# EAGLE board UOF_proto_2V4 (EAGLE 9.5.2)
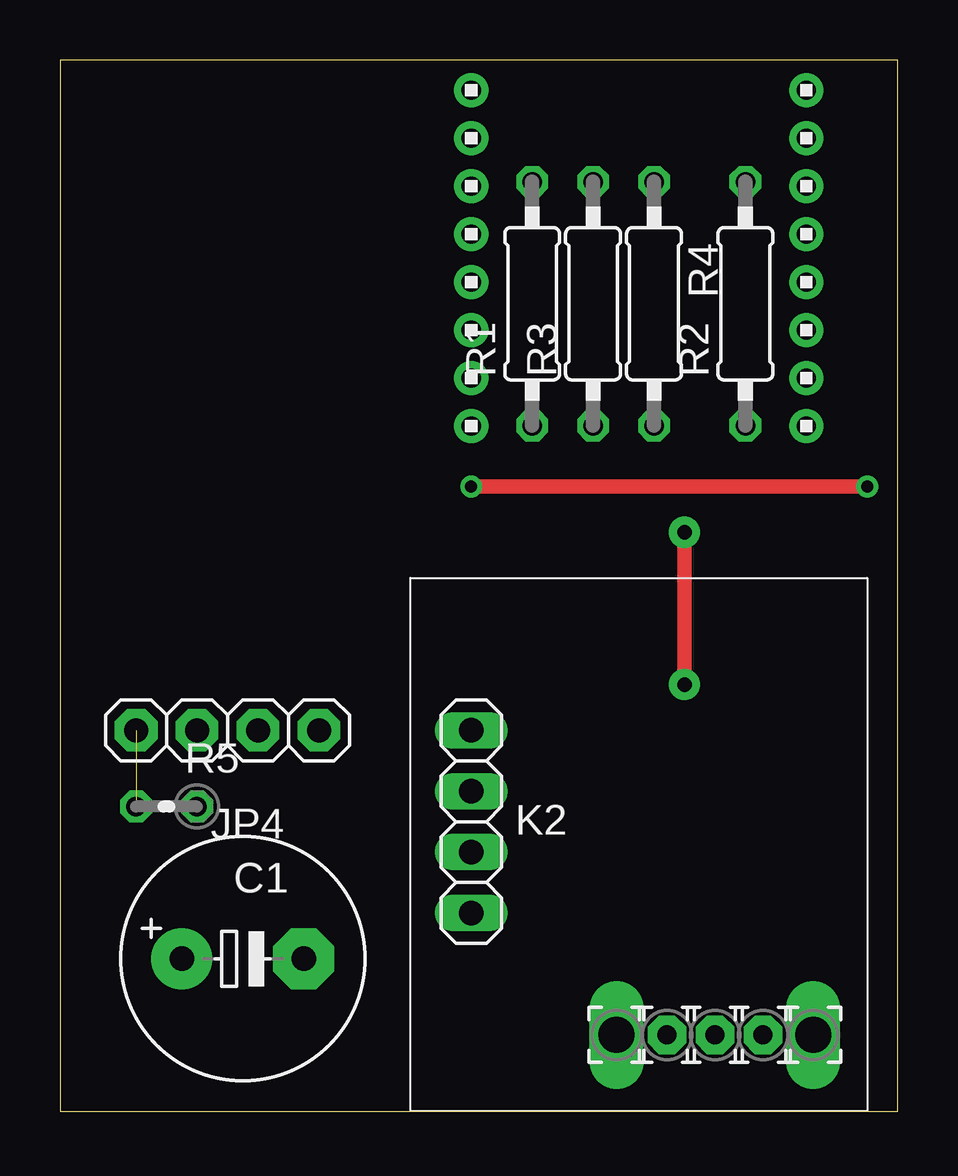
[diagram p0: board, top side]
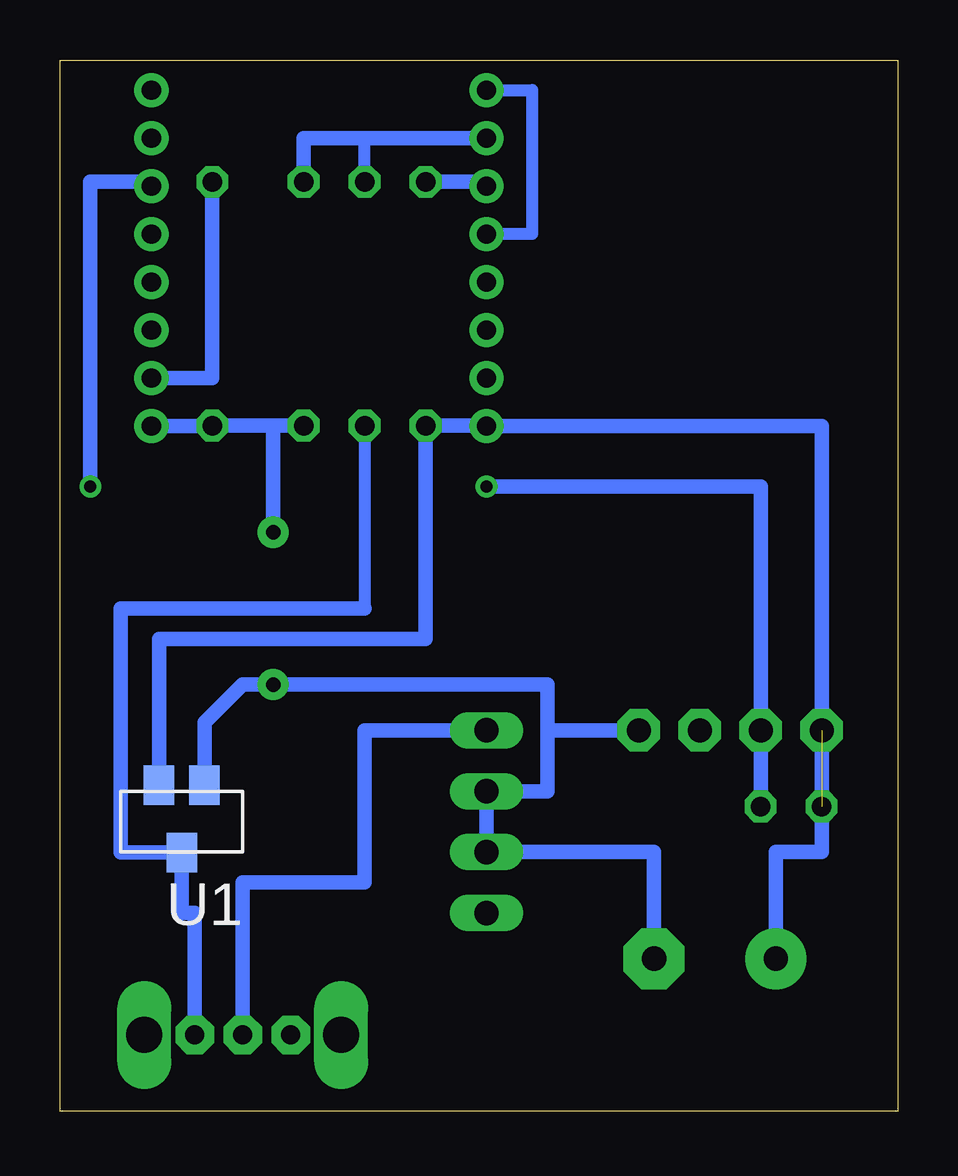
[diagram p1: board, bottom side, seen from below]

Size 34.92 x 43.81 mm. Coordinates in mm from the lower left corner, seen from the top.
Outline: 0,0 34.92,0 34.92,43.81 0,43.81 0,0
Copper layers (1*16): Top 0.035mm / dielectric 1.5mm / Bottom 0.035mm
Design rules "default": minimum track width 20mil, minimum drill 0.5mm, track to track 20mil, track to pad 20mil, pad to pad 20mil, via to via 20mil, smd to smd 20mil, copper to edge 30mil, drill to drill 20mil, minimum pad ring 10mil, minimum via ring 8mil, stop-mask expansion 4mil, vias tented up to drill 0mil, thermal gap 10mil
Net classes: 0 default: width 0.508 mm, clearance 0.508 mm

## Footprints (pad centres in the part's own frame; a part is rotated, then mirrored left to right if it is on the bottom)
E5-10,5 = drill 1.016 pad 2.54: + -2.54,0 | drill 1.016 pad 2.54 octagon: - 2.54,0
1X04 = drill 1 pad 1.778 octagon: 1 -3.81,0; 2 -1.27,0; 3 1.27,0; 4 3.81,0
1X04' = drill 1.016 long: 1 -3.81,0; 2 -1.27,0; 3 1.27,0; 4 3.81,0
1,6/0,8 = drill 0.8 pad 1.6 octagon: 1 0,0
2,0/1,5 = drill 1.5 pad 2 long: 1 0,0
0207/10 = drill 0.813 octagon: 1 -5.08,0; 2 5.08,0
0204V = drill 0.813 octagon: 1 -1.27,0; 2 1.27,0
SOT-23 = smd 1.27 x 1.651: P$1 -0.95,-0.254; P$2 0.95,-0.254; P$3 0,2.554
1X8 = drill 0.8 pad 1.422: 1 -7,0; 2 -5,0; 3 -3,0; 4 -1,0; 5 1,0; 6 3,0; 7 5,0; 8 7,0

## Placement (x,y rotation side)
C1  220µF  [E5-10,5]  7.62,6.35 0 top
JP4  [1X04]  6.99,15.88 0 top
K2  Adafruit micro chargeur  [1X04']  17.14,12.06 270 top
PAD1  1,6/0,8  [1,6/0,8]  27.3,3.17 0 top
PAD2  1,6/0,8  [1,6/0,8]  29.3,3.17 0 top
PAD3  1,6/0,8  [1,6/0,8]  25.3,3.17 0 top
PAD4  N_2,0/1,5  [2,0/1,5]  23.2,3.17 90 top
PAD5  N_2,0/1,5  [2,0/1,5]  31.41,3.17 90 top
R1  12k  [0207/10]  19.68,33.66 90 top
R2  12k  [0207/10]  28.57,33.66 90 top
R3  330k  [0207/10]  22.23,33.66 90 top
R4  100k  [0207/10]  24.77,33.66 270 top
R5  4,7k  [0204V]  4.45,12.7 180 top
U1  MCP1700T-33  [SOT-23]  29.84,13.34 180 bottom
U$1  1X8  [1X8]  17.14,35.56 270 top
U$2  1X8  [1X8]  31.11,35.56 270 top

## Library data of the parts
C1 = rcl; SPICEPREFIX: C
JP4 = _MCL_pinhead
K2 = pinhead
PAD1-PAD5 = _MCL_PADS
R1-R5 = rcl; SPICEPREFIX: R
U1 = MCP1700T-3302E
U$1 U$2 = headers(2mm)

## Nets
GND: C1.- JP4.4 K2.2 K2.3 R2.1 R4.2 U1.P$1 U$2.8
N$2: R3.2 R4.1 U$1.2
N$3: K2.1 PAD1.1
N$4: R2.2 U$2.7
N$5: C1.+ JP4.1 R1.1 R5.2 U1.P$2 U$1.8
N$7: U$1.1 U$1.4
N$8: PAD2.1 R3.1 U1.P$3
N$9: R1.2 U$1.3
N$14: JP4.2 R5.1 U$2.3

## Tracks (layer width: path | path; a pad name or v marks a point on that pad's centre or on a via)
GND  (via drill 0.6 pad 1.3)
  Top 0.61: v26.04,24.13 v26.04,17.78
  Bottom 0.61: v26.04,17.78 14.61,17.78 14.61,15.88 | v26.04,17.78 24.45,17.78 | 26.04,28.57 R2.1 28.57,28.56 U$2.8 28.56,28.56 | 26.04,28.57 R4.2 | U1.P$1 28.89,16.19 27.3,17.78 v26.04,17.78 | 14.61,15.88 14.61,13.34 K2.2 K2.3 10.16,10.79 C1.- | v26.04,24.13 26.04,28.57 | JP4.4 14.61,15.88
N$2
  Bottom 0.508: R3.2 22.23,40.56
  Bottom 0.61: U$1.2 22.23,40.56 24.77,40.56 R4.1
N$3
  Bottom 0.61: PAD1.1 27.3,9.53 22.23,9.53 22.23,15.88 K2.1
N$4
  Bottom 0.61: U$2.7 28.57,30.56 R2.2
N$5  (1 unrouted)
  Bottom 0.61: U1.P$2 30.8,19.68 19.68,19.68 R1.1 17.14,28.57 U$1.8 3.17,28.56 JP4.1 3.17,10.79 5.08,10.79 C1.+
N$7
  Bottom 0.508: U$1.1 15.24,42.56 15.24,36.56 U$1.4
N$8
  Bottom 0.508: R3.1 22.23,20.95
  Bottom 0.61: PAD2.1 29.3,8.26 29.84,8.26 U1.P$3 32.38,10.78 32.38,20.95 22.23,20.95
N$9
  Bottom 0.61: R1.2 17.14,38.73 U$1.3
N$14  (via drill 0.5)
  Top 0.61: v17.14,26.04 v33.66,26.04
  Bottom 0.61: v33.66,26.04 33.66,38.73 31.11,38.73 U$2.3 | v17.14,26.04 5.71,26.04 JP4.2 R5.1